# EAGLE board Jogo da memória - Projeto final (EAGLE 9.7.0)

Size 164.12 x 125.71 mm. Coordinates in mm from the lower left corner, seen from the top.
Outline: 0,0 164.12,0 164.12,125.71 0,125.71 0,0
Copper layers (1*16): Top 0.035mm / dielectric 1.5mm / Bottom 0.035mm
Design rules "default": minimum track width 6mil, minimum drill 0.35mm, track to track 6mil, track to pad 6mil, pad to pad 6mil, via to via 6mil, smd to smd 6mil, copper to edge 40mil, drill to drill 6mil, minimum pad ring 10mil, minimum via ring 8mil, stop-mask expansion 4mil, vias tented up to drill 0mil, thermal gap 10mil

## Footprints (pad centres in the part's own frame; a part is rotated, then mirrored left to right if it is on the bottom)
LEDRD254W60D565H860B_B = drill 0.981 pad 1.581: 1 -1.27,0; 2 1.27,0
LEDRD254W60D565H860B_Y = drill 0.981 pad 1.581: 1 -1.27,0; 2 1.27,0
LEDRD254W60D565H860B_W = drill 0.981 pad 1.581: 1 -1.27,0; 2 1.27,0
7SEG-13 = drill 0.813 long: 1 -5.08,-7.62; 2 -2.54,-7.62; 3 0,-7.62; 4 2.54,-7.62; 5 5.08,-7.62; 6 5.08,7.62; 7 2.54,7.62; 8 0,7.62; 9 -2.54,7.62; 10 -5.08,7.62
PIEZO = drill 1 pad 1.6: 1 -3.5,0; 2 3.5,0
RESAD1016W63L850D250B = drill 0.83 pad 1.43: 1 -5.08,0; 2 5.08,0
SWITCH-MOMENTARY-PTH-6.5MM = drill 1.016 pad 1.88: 1 -3.251,2.261; 2 3.251,2.261; 3 -3.251,-2.261; 4 3.251,-2.261
ARDUINO-UNO-R3-SHIELD = drill 1.016 pad 1.88: 3.3V 24.13,-2.54; 5V 24.13,0; A0 24.13,12.7; A1 24.13,15.24; A2 24.13,17.78; A3 24.13,20.32; A4 24.13,22.86; A5 24.13,25.4; AREF -24.13,-13.97; D2 -24.13,20.32; D3 -24.13,17.78; D4 -24.13,15.24; D5 -24.13,12.7; D6 -24.13,10.16; D7 -24.13,7.62; D8 -24.13,3.81; D9 -24.13,1.27; D10 -24.13,-1.27; D11 -24.13,-3.81; D12 -24.13,-6.35; D13 -24.13,-8.89; GND@0 24.13,2.54; GND@1 24.13,5.08; GND@2 -24.13,-11.43; IOREF 24.13,-7.62; NC 24.13,-10.16; RES 24.13,-5.08; RX -24.13,25.4; SCL -24.13,-19.05; SDA -24.13,-16.51; TX -24.13,22.86; VIN 24.13,7.62

## Placement (x,y rotation side)
D1  BLUE  [LEDRD254W60D565H860B_B]  22.84,36.91 180 top
D5  YELLOW  [LEDRD254W60D565H860B_Y]  43.16,36.91 180 top
D6  WHITE  [LEDRD254W60D565H860B_W]  63.48,36.91 180 top
DIGIT1  7SEG-CK  [7SEG-13]  118.09,26.75 0 top
PIEZO2  PIEZO  [PIEZO]  152.38,36.91 180 top
R1  220  [RESAD1016W63L850D250B]  125.71,39.45 0 top
R2  1k  [RESAD1016W63L850D250B]  6.33,8.97 90 top
R14  10k  [RESAD1016W63L850D250B]  29.19,34.37 0 top
R16  10k  [RESAD1016W63L850D250B]  49.51,34.37 0 top
R17  10k  [RESAD1016W63L850D250B]  69.83,34.37 0 top
R18  220  [RESAD1016W63L850D250B]  110.47,39.45 0 top
R20  220  [RESAD1016W63L850D250B]  128.25,36.91 180 top
R21  220  [RESAD1016W63L850D250B]  107.93,36.91 0 top
R22  220  [RESAD1016W63L850D250B]  110.47,16.59 0 top
R23  220  [RESAD1016W63L850D250B]  125.71,16.59 180 top
R24  220  [RESAD1016W63L850D250B]  107.93,14.05 0 top
R25  10k  [RESAD1016W63L850D250B]  52.05,11.51 90 top
R26  10k  [RESAD1016W63L850D250B]  72.37,11.51 90 top
R27  10k  [RESAD1016W63L850D250B]  31.73,11.51 90 top
S1  SWITCH_MOMENTARY  [SWITCH-MOMENTARY-PTH-6.5MM]  8.87,25.48 90 top
S4  SWITCH_MOMENTARY  [SWITCH-MOMENTARY-PTH-6.5MM]  29.19,25.48 90 top
S5  SWITCH_MOMENTARY  [SWITCH-MOMENTARY-PTH-6.5MM]  49.51,25.48 90 top
S6  SWITCH_MOMENTARY  [SWITCH-MOMENTARY-PTH-6.5MM]  69.83,25.48 90 top
U2  ARDUINO-UNO-R3-SHIELD  [ARDUINO-UNO-R3-SHIELD]  91.91,95.87 270 top

## Library data of the parts
D1 = Tinkercad; CATEGORY: Opto-Electronic; SUB-CATEGORY: LED; VALUE: LED_BLUE
D5 = Tinkercad; CATEGORY: Opto-Electronic; SUB-CATEGORY: LED; VALUE: LED_YELLOW
D6 = Tinkercad; CATEGORY: Opto-Electronic; SUB-CATEGORY: LED; VALUE: LED_WHITE
DIGIT1 = Tinkercad; CATEGORY: Opto-Electronic; SUB-CATEGORY: Display; TYPE: 7-Segment
PIEZO2 R1 R2 R14 R16-R18 R20-R27 S1 S4-S6 U2 = Tinkercad

## Nets
D1_A: D1.1 R14.1
D5_A: D5.1 R16.1
D6_A: D6.1 R17.1
DIGIT1_A: DIGIT1.7 R1.1
DIGIT1_B: DIGIT1.6 R20.2
DIGIT1_C: DIGIT1.4 R23.2
DIGIT1_D: DIGIT1.2 R22.2
DIGIT1_E: DIGIT1.1 R24.2
DIGIT1_F: DIGIT1.9 R18.2
DIGIT1_G: DIGIT1.10 R21.2
U2_5V: S1.3 S1.4 S4.1 S4.2 S5.1 S5.2 S6.1 S6.2 U2.5V
U2_A3: R27.2 S4.3 S4.4 U2.A3
U2_A4: R25.2 S5.3 S5.4 U2.A4
U2_A5: R26.2 S6.3 S6.4 U2.A5
U2_D2: R1.2 U2.D2
U2_D3: R20.1 U2.D3
U2_D4: R18.1 U2.D4
U2_D5: R21.1 U2.D5
U2_D6: R23.1 U2.D6
U2_D7: R22.1 U2.D7
U2_D8: R24.1 U2.D8
U2_D9: R2.2 S1.1 S1.2 U2.D9
U2_D10: PIEZO2.1 U2.D10
U2_D11: R17.2 U2.D11
U2_D12: R16.2 U2.D12
U2_D13: R14.2 U2.D13
U2_GND: D1.2 D5.2 D6.2 DIGIT1.3 PIEZO2.2 R2.1 R25.1 R26.1 R27.1 U2.GND@0 U2.GND@1 U2.GND@2

## Tracks (layer width: path | path; a pad name or v marks a point on that pad's centre or on a via)
D1_A  (1 unrouted)
D5_A  (1 unrouted)
D6_A  (1 unrouted)
DIGIT1_A  (1 unrouted)
DIGIT1_B  (1 unrouted)
DIGIT1_C  (1 unrouted)
DIGIT1_D  (1 unrouted)
DIGIT1_E  (1 unrouted)
DIGIT1_F  (1 unrouted)
DIGIT1_G  (1 unrouted)
U2_5V  (8 unrouted)
U2_A3  (3 unrouted)
U2_A4  (3 unrouted)
U2_A5  (3 unrouted)
U2_D2  (1 unrouted)
U2_D3  (1 unrouted)
U2_D4  (1 unrouted)
U2_D5  (1 unrouted)
U2_D6  (1 unrouted)
U2_D7  (1 unrouted)
U2_D8  (1 unrouted)
U2_D9  (3 unrouted)
U2_D10  (1 unrouted)
U2_D11  (1 unrouted)
U2_D12  (1 unrouted)
U2_D13  (1 unrouted)
U2_GND  (11 unrouted)